# Altium PCB SpaceVNXDaughterBoard.PcbDoc (part 1 of 2)
Units mm, origin at the board's own origin, x right, y up, seen from the top; angles counter-clockwise.
Board outline 55 x 84 mm, 4 copper layers (Top Layer, PWR, GND, Bottom Layer), stack 0.84 mm thick; 87 components, 125 nets, 647 pads, 201 vias.
Unrouted connection lines stored in the file: 124.
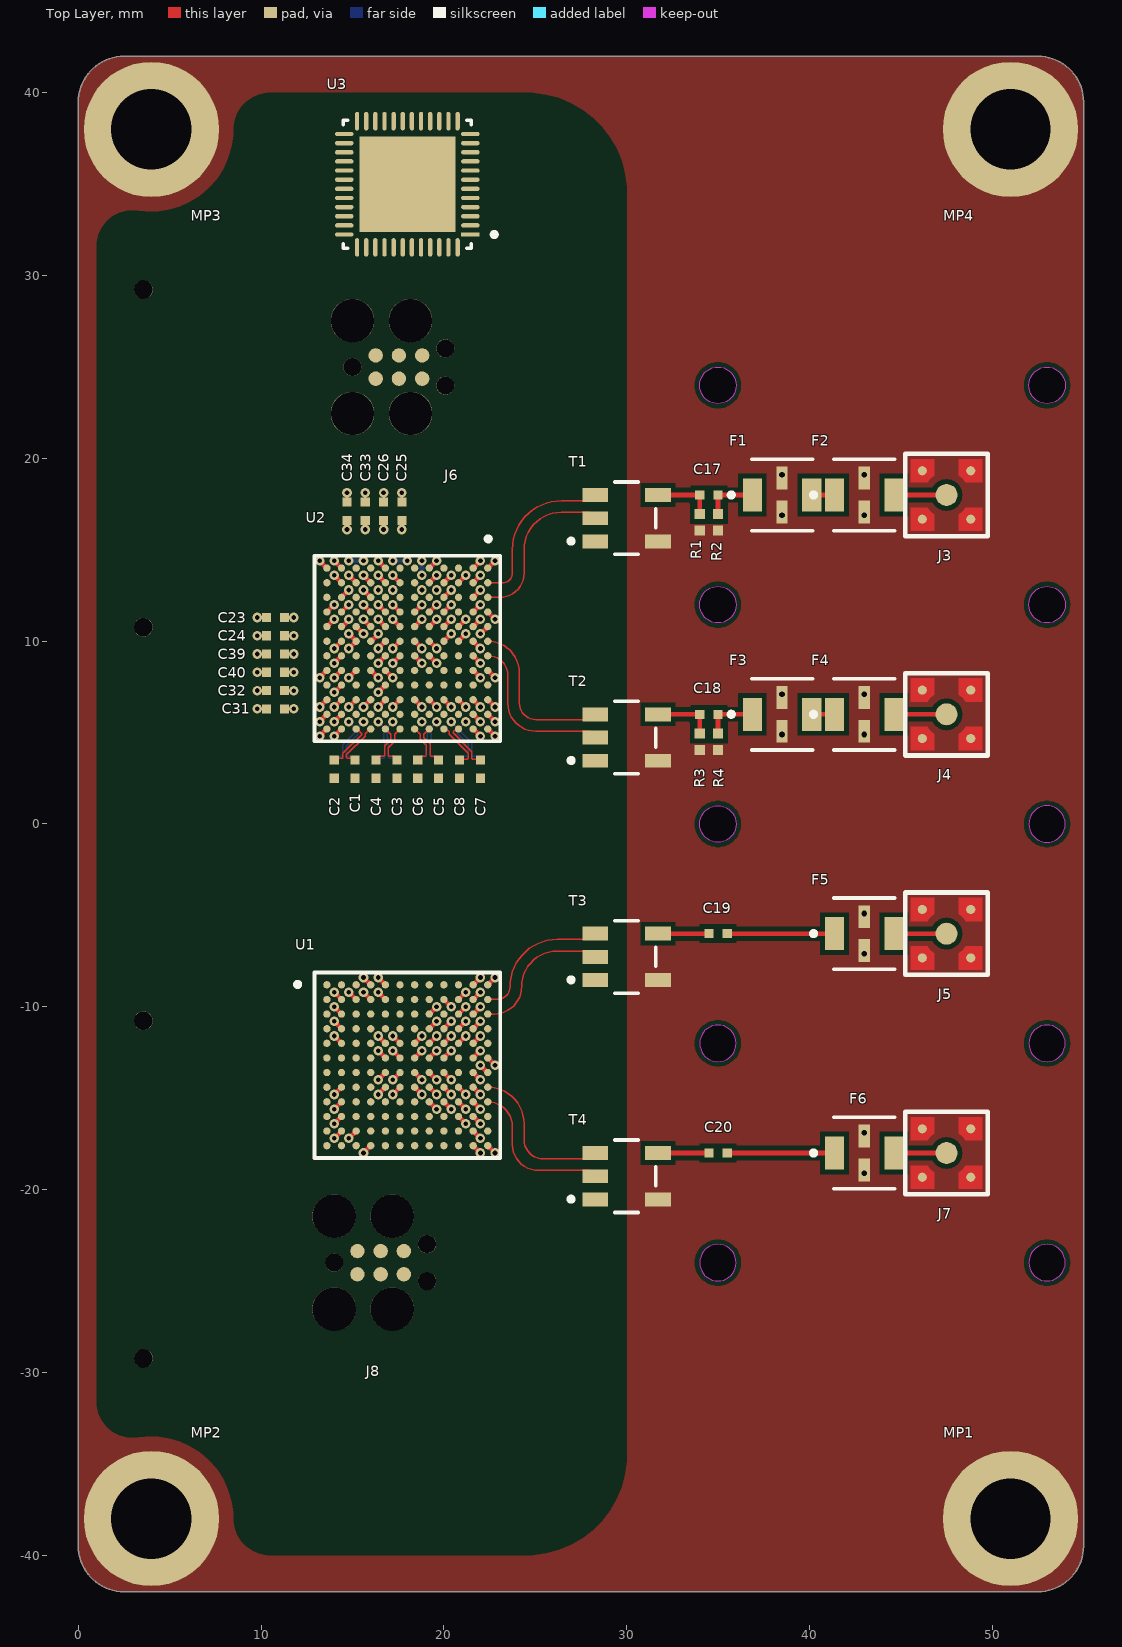
[diagram p0: Top Layer view]
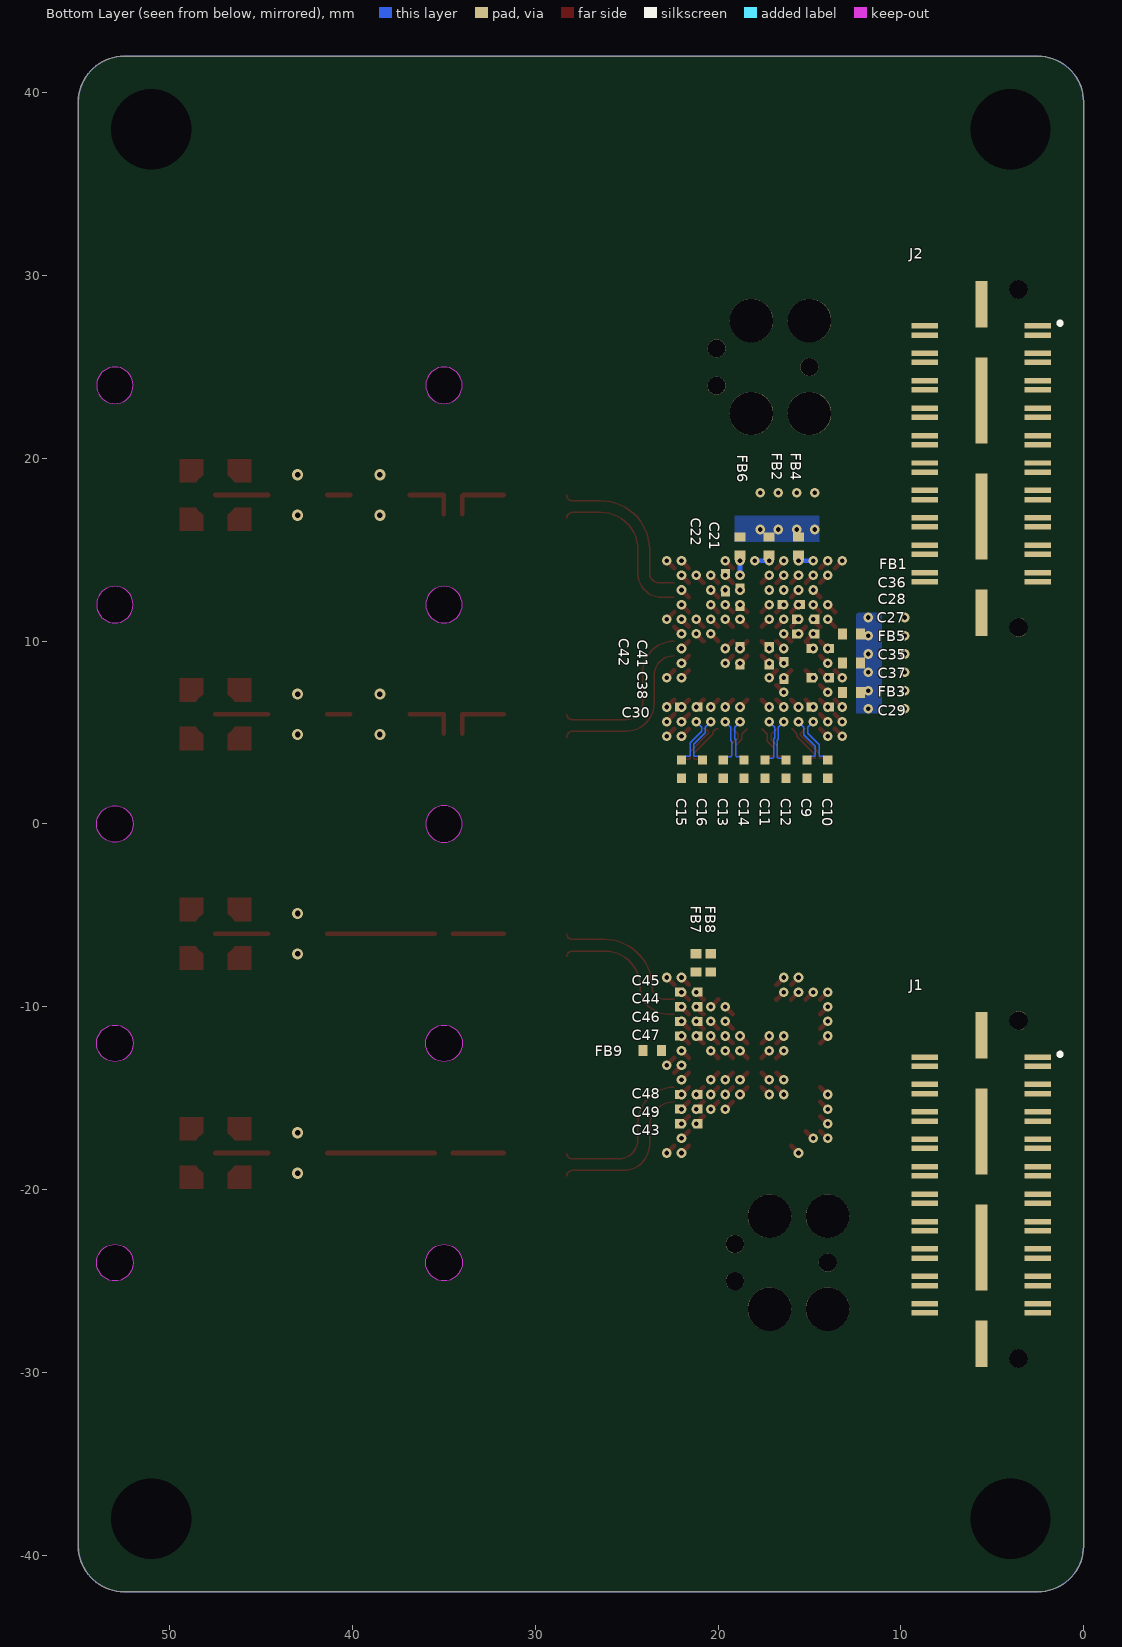
[diagram p1: Bottom Layer view, seen from below]
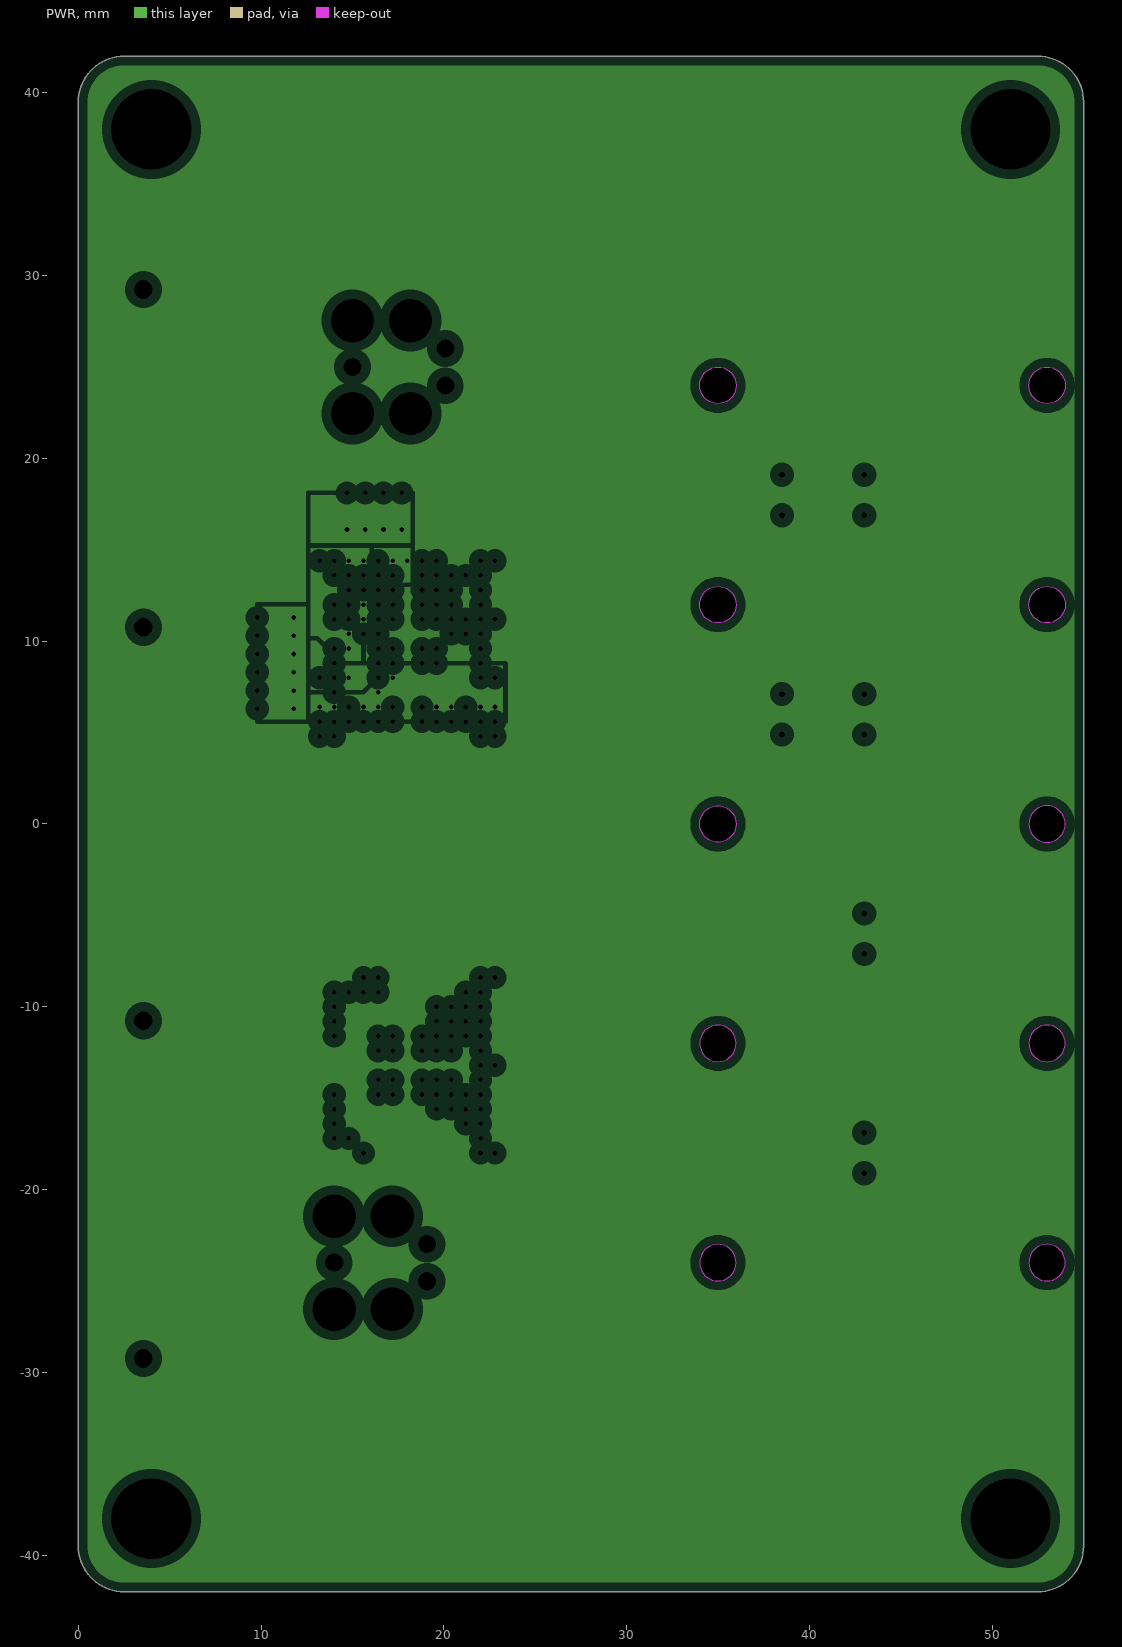
[diagram p2: PWR, clearances drawn from the general rule]
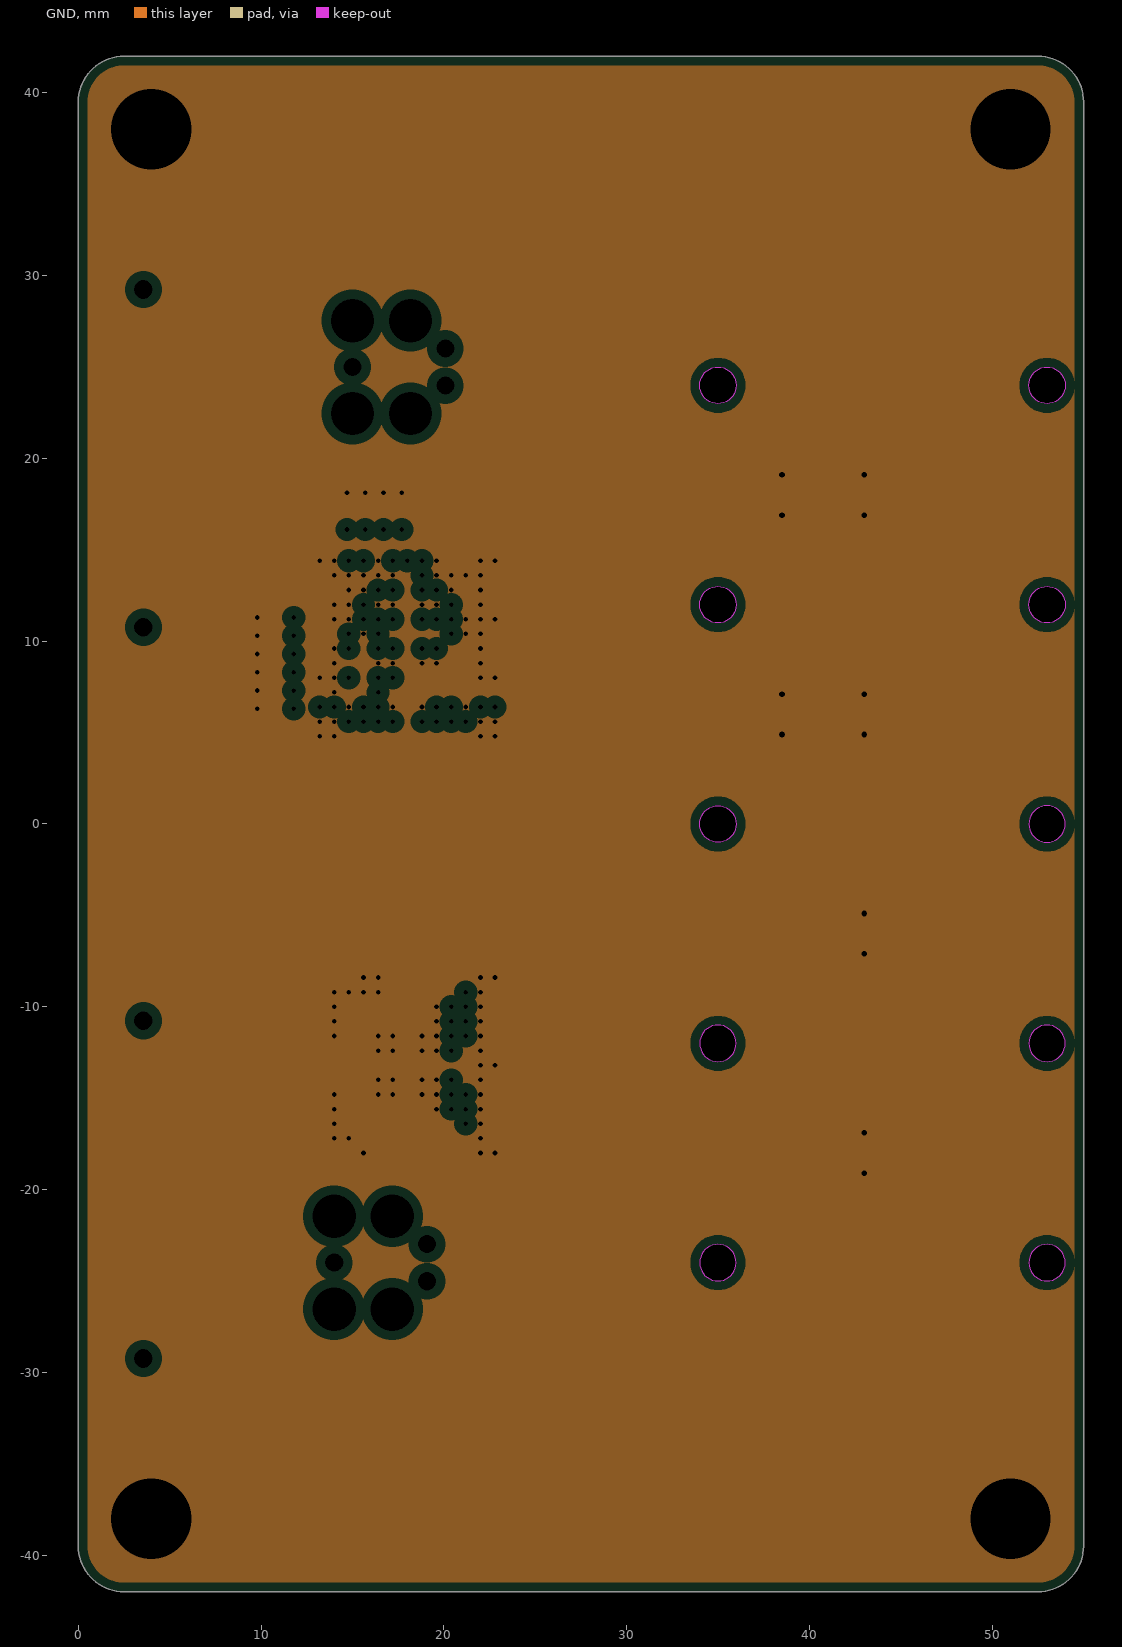
[diagram p3: GND, clearances drawn from the general rule]

## Layer stack, top to bottom
Top Solder: solder mask 0.0127, Solder Resist, Dk 3.8
Top Layer: signal copper 0.07
Dielectric 1: prepreg 0.1, 2313, Dk 4.05
PWR: plane copper 0.0175, net (Multiple Nets)
Core: core 0.465, FR-4, Dk 4.5
GND: plane copper 0.0175, net GND
Dielectric 2: prepreg 0.1, 2313, Dk 4.05
Bottom Layer: signal copper 0.07
Bottom Solder: solder mask 0.0127, Solder Resist, Dk 3.8

## Board outline
0,-39.5 0,39.5 cw(c2.499,39.501) 2.5,42 52.5,42 cw(c52.501,39.501) 55,39.5 55,-39.5 cw(c52.501,-39.501) 52.5,-42 2.5,-42 cw(c2.499,-39.501)
cut-out: 53,23 cw(c53,24) 52,24 cw(c53,24) 53,25 cw(c53,24) 54,24 cw(c53,24)
cut-out: 34.991,23 cw(c34.991,24) 33.991,24 cw(c34.991,24) 34.991,25 cw(c34.991,24) 35.991,24 cw(c34.991,24)
cut-out: 53,11 cw(c53,12) 52,12 cw(c53,12) 53,13 cw(c53,12) 54,12 cw(c53,12)
cut-out: 34.991,11 cw(c34.991,12) 33.991,12 cw(c34.991,12) 34.991,13 cw(c34.991,12) 35.991,12 cw(c34.991,12)
cut-out: 52,0 ccw(c53,0) 53,-1 ccw(c53,0) 54,0 ccw(c53,0) 53,1 ccw(c53,0)
cut-out: 34.991,-1 cw(c34.991,0) 33.991,0 cw(c34.991,0) 34.991,1 cw(c34.991,0) 35.991,0 cw(c34.991,0)
cut-out: 52,-12 ccw(c53,-12) 53,-13 ccw(c53,-12) 54,-12 ccw(c53,-12) 53,-11 ccw(c53,-12)
cut-out: 33.991,-12 ccw(c34.991,-12) 34.991,-13 ccw(c34.991,-12) 35.991,-12 ccw(c34.991,-12) 34.991,-11 ccw(c34.991,-12)
cut-out: 33.991,-24 ccw(c34.991,-24) 34.991,-25 ccw(c34.991,-24) 35.991,-24 ccw(c34.991,-24) 34.991,-23 ccw(c34.991,-24)
cut-out: 52,-24 ccw(c53,-24) 53,-25 ccw(c53,-24) 54,-24 ccw(c53,-24) 53,-23 ccw(c53,-24)

## Design rules (kind name [scope] priority, off if disabled: settings)
Clearance [All] p1: gap=0.254 ignorepadtopadclearanceinfootprint=FALSE except(0: Arc-Hole Track-Hole SMDPad-Hole THPad-Hole Via-Hole Fill-Hole Poly-Hole Region-Hole Text-Hole; 0.1: Arc-Arc Arc-Track Arc-SMDPad Arc-Via Track-Track Track-SMDPad Track-Via SMDPad-SMDPad SMDPad-Via)
DiffPairsRouting DiffPairsRouting_D100 [All] p1: maxlimit=0.127 minlimit=0.127 mostfreqgap=0.127 toplayer_minwidth=0.073 toplayer_maxwidth=0.073 toplayer_prefwidth=0.073 bottomlayer_minwidth=0.073 bottomlayer_maxwidth=0.073 bottomlayer_prefwidth=0.073 impedanceprofiledriven=TRUE impedanceprofileid={867DA405-6C6B-40CE-A2AF-8CDF2B17F313} impedanceprofilevalue=100.000000 maxuncoupledlength=12.7
DiffPairsRouting [All] p2: maxlimit=0.254 minlimit=0.254 mostfreqgap=0.254 toplayer_minwidth=0.381 toplayer_maxwidth=0.381 toplayer_prefwidth=0.381 bottomlayer_minwidth=0.381 bottomlayer_maxwidth=0.381 bottomlayer_prefwidth=0.381 maxuncoupledlength=12.7
PlaneClearance [All] p1: clearance=0.508
PlaneConnect [All] p1: planeconnectstyle=Direct reliefexpansion=0.508 reliefentries=4 reliefconductorwidth=0.254 reliefairgap=0.254
PolygonConnect [All] p1: connectstyle=Direct reliefconductorwidth=0.254 reliefentries=4 polygonreliefangle="90 Angle" airgapwidth=0.254
RoutingVias [All] p1: holewidth=0.25 width=0.5 viastyle="Through Hole" minholewidth=0.25 minwidth=0.5 maxholewidth=0.711 maxwidth=1.27
SolderMaskExpansion [All] p1: expansion=0.102 istentingtop=FALSE
Width [All] p1: maxlimit=0.254 minlimit=0.1 preferedwidth=0.127 minimp=50.000000 maximp=50.000000 favimp=50.000000
Width Width_S50 [All] p2: maxlimit=0.15 minlimit=0.15 preferedwidth=0.15 impedanceprofiledriven=TRUE impedanceprofileid={26B725AB-FFA3-4EF3-BDC9-379EF556A361} impedanceprofilevalue=50.000000 minimp=50.000000 maximp=50.000000 favimp=50.000000
27 further rules are at their usual default settings.

## Classes and differential pairs
differential pair class D100: ADC_INA ADC_INB DAC_IOUTA DAC_IOUTC J1_RX0 J1_RX1 J1_RX2 J1_RX3 J1_TX0 J1_TX1 J1_TX2 J1_TX3 J2_P2C_CLK J2_RX0 J2_RX1 J2_RX2 J2_RX3 J2_TX0 J2_TX1 J2_TX2 J2_TX3 TX0 TX1 TX2 TX3 TX4 TX5 TX6 TX7
differential pair J1_C2P_CLK: +J1_C2P_CLK_P -J1_C2P_CLK_N
differential pair ADC_INB: +ADC_INB_P -ADC_INB_N
differential pair ADC_INA: +ADC_INA_P -ADC_INA_N
differential pair TX7: +TX7_P -TX7_N
differential pair TX6: +TX6_P -TX6_N
differential pair TX5: +TX5_P -TX5_N
differential pair TX4: +TX4_P -TX4_N
differential pair TX3: +TX3_P -TX3_N
differential pair TX2: +TX2_P -TX2_N
differential pair TX1: +TX1_P -TX1_N
differential pair TX0: +TX0_P -TX0_N
differential pair J2_TX3: +J2_TX3_P -J2_TX3_N
differential pair J2_TX2: +J2_TX2_P -J2_TX2_N
differential pair J2_TX1: +J2_TX1_P -J2_TX1_N
differential pair J2_TX0: +J2_TX0_P -J2_TX0_N
differential pair J2_RX3: +J2_RX3_P -J2_RX3_N
differential pair J2_RX2: +J2_RX2_P -J2_RX2_N
differential pair J2_RX1: +J2_RX1_P -J2_RX1_N
differential pair J2_RX0: +J2_RX0_P -J2_RX0_N
differential pair J2_P2C_CLK: +J2_P2C_CLK_P -J2_P2C_CLK_N
differential pair J2_C2P_CLK: +J2_C2P_CLK_P -J2_C2P_CLK_N
differential pair J1_TX3: +J1_TX3_P -J1_TX3_N
differential pair J1_TX2: +J1_TX2_P -J1_TX2_N
differential pair J1_TX1: +J1_TX1_P -J1_TX1_N
differential pair J1_TX0: +J1_TX0_P -J1_TX0_N
differential pair J1_RX3: +J1_RX3_P -J1_RX3_N
differential pair J1_RX2: +J1_RX2_P -J1_RX2_N
differential pair J1_RX1: +J1_RX1_P -J1_RX1_N
differential pair J1_RX0: +J1_RX0_P -J1_RX0_N
differential pair DAC_IOUTC: +DAC_IOUTC_P -DAC_IOUTC_N
differential pair DAC_IOUTA: +DAC_IOUTA_P -DAC_IOUTA_N

## Components (designator, comment, footprint, x,y, rotation, side; value= is the part's Value field where it differs from the comment)
C1 "220nF, 10V" WURTH_WCAP-CSGP_0402 15.143,3 r90 top locked
C2 "220nF, 10V" WURTH_WCAP-CSGP_0402 14,3 r90 top locked
C3 "220nF, 10V" WURTH_WCAP-CSGP_0402 17.429,3 r90 top locked
C4 "220nF, 10V" WURTH_WCAP-CSGP_0402 16.286,3 r90 top locked
C5 "220nF, 10V" WURTH_WCAP-CSGP_0402 19.714,3 r90 top locked
C6 "220nF, 10V" WURTH_WCAP-CSGP_0402 18.571,3 r90 top locked
C7 "220nF, 10V" WURTH_WCAP-CSGP_0402 22,3 r90 top locked
C8 "220nF, 10V" WURTH_WCAP-CSGP_0402 20.857,3 r90 top locked
C9 "220nF, 10V" WURTH_WCAP-CSGP_0402 15.143,3 r90 bottom locked
C10 "220nF, 10V" WURTH_WCAP-CSGP_0402 14,3 r90 bottom locked
C11 "220nF, 10V" WURTH_WCAP-CSGP_0402 17.429,3 r90 bottom locked
C12 "220nF, 10V" WURTH_WCAP-CSGP_0402 16.286,3 r90 bottom locked
C13 "220nF, 10V" WURTH_WCAP-CSGP_0402 19.714,3 r90 bottom locked
C14 "220nF, 10V" WURTH_WCAP-CSGP_0402 18.571,3 r90 bottom locked
C15 "220nF, 10V" WURTH_WCAP-CSGP_0402 22,3 r90 bottom locked
C16 "220nF, 10V" WURTH_WCAP-CSGP_0402 20.857,3 r90 bottom locked
C17 "10pF, 16V" WURTH_WCAP-CSGP_0402 34.5,18 r0 top locked
C18 "10pF, 16V" WURTH_WCAP-CSGP_0402 34.5,6 r0 top locked
C19 "10pF, 16V" WURTH_WCAP-CSGP_0402 35,-6 r0 top locked
C20 "10pF, 16V" WURTH_WCAP-CSGP_0402 35,-18 r0 top locked
C21 "10µF, 6.3V" WURTH_WCAP-CSGP_0402 18.8,12.4 r90 bottom locked
C22 "100nF, 10V" WURTH_WCAP-CSGP_0402 19.6,13.2 r270 bottom locked
C23 "10µF, 6.3V" WURTH_WCAP-CSGP_0402 10.787,11.3 r0 top locked
C24 "100nF, 10V" WURTH_WCAP-CSGP_0402 10.787,10.3 r0 top locked
C25 "100nF, 10V" WURTH_WCAP-CSGP_0402 17.7,17.113 r270 top locked
C26 "10µF, 6.3V" WURTH_WCAP-CSGP_0402 16.7,17.113 r270 top locked
C27 "100nF, 10V" WURTH_WCAP-CSGP_0402 15.2,11.2 r0 bottom locked
C28 "10µF, 6.3V" WURTH_WCAP-CSGP_0402 16,12 r180 bottom locked
C29 "10µF, 6.3V" WURTH_WCAP-CSGP_0402 14.4,6.4 r180 bottom locked
C30 "100nF, 10V" WURTH_WCAP-CSGP_0402 21.6,6.4 r0 bottom locked
C31 "10µF, 6.3V" WURTH_WCAP-CSGP_0402 10.787,6.3 r0 top locked
C32 "100nF, 10V" WURTH_WCAP-CSGP_0402 10.787,7.3 r0 top locked
C33 "100nF, 10V" WURTH_WCAP-CSGP_0402 15.7,17.113 r270 top locked
C34 "10µF, 6.3V" WURTH_WCAP-CSGP_0402 14.7,17.113 r270 top locked
C35 "100nF, 10V" WURTH_WCAP-CSGP_0402 14.4,9.6 r0 bottom locked
C36 "10µF, 6.3V" WURTH_WCAP-CSGP_0402 15.2,10.4 r180 bottom locked
C37 "10µF, 6.3V" WURTH_WCAP-CSGP_0402 14.4,8 r0 bottom locked
C38 "100nF, 10V" WURTH_WCAP-CSGP_0402 16.4,8.4 r270 bottom locked
C39 "10µF, 6.3V" WURTH_WCAP-CSGP_0402 10.787,9.3 r0 top locked
C40 "100nF, 10V" WURTH_WCAP-CSGP_0402 10.787,8.3 r0 top locked
C41 "10µF, 6.3V" WURTH_WCAP-CSGP_0402 17.2,9.2 r90 bottom locked
C42 "10µF, 6.3V" WURTH_WCAP-CSGP_0402 18.8,9.2 r90 bottom locked
C43 "10µF, 6.3V" WURTH_WCAP-CSGP_0402 21.6,-16.4 r180 bottom
C44 "100nF, 10V" WURTH_WCAP-CSGP_0402 21.6,-10 r180 bottom
C45 "100nF, 10V" WURTH_WCAP-CSGP_0402 21.6,-9.2 r180 bottom
C46 "10µF, 6.3V" WURTH_WCAP-CSGP_0402 21.6,-10.8 r180 bottom
C47 "100nF, 10V" WURTH_WCAP-CSGP_0402 21.6,-11.6 r180 bottom
C48 "100nF, 10V" WURTH_WCAP-CSGP_0402 21.6,-14.8 r180 bottom
C49 "100nF, 10V" WURTH_WCAP-CSGP_0402 21.6,-15.6 r180 bottom
F1 "BFTC-XXXX+" Mini-Circuits_FV1206 38.5,18 r0 top locked
F2 "BFTC-XXXX+" Mini-Circuits_FV1206 43,18 r0 top locked
F3 "BFTC-XXXX+" Mini-Circuits_FV1206 38.5,6 r0 top locked
F4 "BFTC-XXXX+" Mini-Circuits_FV1206 43,6 r0 top locked
F5 "BFTC-XXXX+" Mini-Circuits_FV1206 43,-6 r0 top locked
F6 "BFTC-XXXX+" Mini-Circuits_FV1206 43,-18 r0 top locked
FB1 "120Ohm, 1.1A" WURTH-CBF_0402 12.7,10.4 r0 bottom locked
FB2 "120Ohm, 1.1A" WURTH-CBF_0402 17.2,15.2 r270 bottom locked
FB3 "120Ohm, 1.1A" WURTH-CBF_0402 12.7,7.2 r0 bottom locked
FB4 "120Ohm, 1.1A" WURTH-CBF_0402 15.6,15.2 r270 bottom locked
FB5 "120Ohm, 1.1A" WURTH-CBF_0402 12.7,8.8 r0 bottom locked
FB6 "120Ohm, 1.1A" WURTH-CBF_0402 18.8,15.2 r270 bottom locked
FB7 "120Ohm, 1.1A" WURTH-CBF_0402 21.2,-7.6 r270 bottom
FB8 "120Ohm, 1.1A" WURTH-CBF_0402 20.4,-7.6 r270 bottom
FB9 "120Ohm, 1.1A" WURTH-CBF_0402 23.6,-12.4 r180 bottom
J1 "QTH-020-01-F-D-DP" SAMTEC_QTH-020-01-X-D-DP-A 5.59,-20 r270 bottom locked
J2 "QTH-020-01-F-D-DP" SAMTEC_QTH-020-01-X-D-DP-A 5.59,20 r270 bottom locked
J3 "MMCX-J-P-X-ST-SM1" MMCX-J-P-X-ST-SM1 47.5,18 r0 top locked
J4 "MMCX-J-P-X-ST-SM1" MMCX-J-P-X-ST-SM1 47.5,6 r0 top locked
J5 "MMCX-J-P-X-ST-SM1" MMCX-J-P-X-ST-SM1 47.5,-6 r0 top locked
J6 "TC2030" TC2030-DUAL 15,25 r0 top
J7 "MMCX-J-P-X-ST-SM1" MMCX-J-P-X-ST-SM1 47.5,-18 r0 top locked
J8 "TC2030" TC2030-DUAL 14,-24 r0 top locked
MP1 "M3x4mm" 90910A572#1 50.997,-38.002 r0 top
MP2 "M3x4mm" 90910A572#2 4.004,-37.999 r0 top
MP3 "M2x4mm" 90910A572#3 4.312,37.75 r0 top
MP4 "M2x4mm" 90910A572#4 51.009,38 r0 top
R1 "100 Ω" PANASONIC_ERJ2G_0402 34,16.5 r90 top locked
R2 "100 Ω" PANASONIC_ERJ2G_0402 35,16.5 r90 top locked
R3 "100 Ω" PANASONIC_ERJ2G_0402 34,4.5 r90 top locked
R4 "100 Ω" PANASONIC_ERJ2G_0402 35,4.5 r90 top locked
T1 "ETC1-1T-2TR" MA-COM_ETC1-1T-2TR 30,16.73 r90 top locked
T2 "ETC1-1T-2TR" MA-COM_ETC1-1T-2TR 30,4.73 r90 top locked
T3 "ETC1-1T-2TR" MA-COM_ETC1-1T-2TR 30,-7.27 r90 top locked
T4 "ETC1-1T-2TR" MA-COM_ETC1-1T-2TR 30,-19.27 r90 top locked
U1 "DAC37J82" TEXAS_FCBGA144 18,-13.2 r0 top locked
U2 "ADC12DJ800" TEXAS_FCBGA144 18,9.6 r270 top locked
U3 "MSP430FR5969IRGZR" TEXAS_VQFN48 18,35 r180 top

## Footprints (in the part's own frame and the unit in brackets; to place one, negate y for a bottom-side part, rotate by r counter-clockwise, add the part's x,y. Pads: shape width x height; smd on the part's side, far side on the other; paste and mask are expansions set on the pad)
90910A572#1 [mm] "Button Head Torx Screws 18-8 Stainless Steel, M3 x 0.5 mm Thread, 4 mm Long"
  round 7.4 / inner round 0 / far side round 0 hole 4.4 unplated paste-403.566: 1(0.003,0.002)
  body extent -2.85,-2.85 2.85,2.85, height 1.7
90910A572#2 [mm] "Button Head Torx Screws 18-8 Stainless Steel, M3 x 0.5 mm Thread, 4 mm Long"
  round 7.4 / inner round 0 / far side round 0 hole 4.4 unplated paste-403.566: 1(-0.004,-0.001)
  body extent -2.85,-2.85 2.85,2.85, height 1.7
90910A572#3 [mm] "Button Head Torx Screws 18-8 Stainless Steel, M3 x 0.5 mm Thread, 4 mm Long"
  round 7.4 / inner round 0 / far side round 0 hole 4.4 unplated paste-403.566: 1(-0.312,0.25)
  body extent -2.85,-2.85 2.85,2.85, height 1.7
90910A572#4 [mm] "Button Head Torx Screws 18-8 Stainless Steel, M3 x 0.5 mm Thread, 4 mm Long"
  round 7.4 / inner round 0 / far side round 0 hole 4.4 unplated paste-403.566: 1(-0.009,0)
  body extent -2.85,-2.85 2.85,2.85, height 1.7
MA-COM_ETC1-1T-2TR [mm]
  rect 0.76x1.4 smd paste+0 mask+0: 1(-1.27,1.715) 2(0,1.715) 3(1.27,1.715) 4(1.27,-1.715) 5(-1.27,-1.715)
  silkscreen extent -1.98,-1.59 1.98,3.16, body extent -2.08,-2.51 2.08,2.51, height 0.25
Mini-Circuits_FV1206 [mil] "3.2 X 1.6 mm Ceramic Body, 0.94 mm Height"
  rect 41x71 smd paste+0 mask+0: 1(-64,0) 3(64,0)
  rect 24x49 smd paste+0 mask+0: 2(0,-36.5) 2(0,36.5)
  silkscreen extent -114,-77 66,77, body extent -88,-65 88,65, height 10
MMCX-J-P-X-ST-SM1 [mm]
  round 0.5 smd: G1(-1.325,1.325) G2(1.325,1.325) G3(-1.325,-1.325) G4(1.325,-1.325)
  round 1.2 smd mask+0.05: S1(0,0)
  Top Layer region: 1.059,-0.688 1.962,-0.688 1.962,-1.962 0.663,-1.962 0.667,-1.08 0.901,-0.901 1.062,-0.69 1.059,-0.688
  Top Layer region: -1.059,-0.688 -1.962,-0.688 -1.962,-1.962 -0.663,-1.962 -0.667,-1.08 -0.901,-0.901 -1.062,-0.69 -1.059,-0.688
  Top Layer region: 1.059,0.688 1.962,0.688 1.962,1.962 0.663,1.962 0.667,1.08 0.901,0.901 1.062,0.69 1.059,0.688
  Top Layer region: -1.059,0.688 -1.962,0.688 -1.962,1.962 -0.663,1.962 -0.667,1.08 -0.901,0.901 -1.062,0.69 -1.059,0.688
  silkscreen extent -2.25,-2.25 2.25,2.25, body extent -1.72,-1.75 1.73,1.75, height 5
PANASONIC_ERJ2G_0402 [mm] "Chip Resistor, 2-Leads, Body 1,00x0,50mm, IPC Medium Density"
  rect 0.55x0.55 smd: 1(-0.45,0) 2(0.45,0)
  body extent -0.5,-0.25 0.5,0.25, height 0.36
SAMTEC_QTH-020-01-X-D-DP-A [mm]
  rect 0.3x1.45 smd: 01(-7.25,3.09) 02(-7.25,-3.09) 03(-6.75,3.09) 04(-6.75,-3.09) 05(-5.75,3.09) 06(-5.75,-3.09) 07(-5.25,3.09) 08(-5.25,-3.09) 09(-4.25,3.09) 10(-4.25,-3.09) 11(-3.75,3.09) 12(-3.75,-3.09) 13(-2.75,3.09) 14(-2.75,-3.09) 15(-2.25,3.09) 16(-2.25,-3.09) 17(-1.25,3.09) 18(-1.25,-3.09) 19(-0.75,3.09) 20(-0.75,-3.09) 21(0.25,3.09) 22(0.25,-3.09) 23(0.75,3.09) 24(0.75,-3.09) 25(1.75,3.09) 26(1.75,-3.09) 27(2.25,3.09) 28(2.25,-3.09) 29(3.25,3.09) 30(3.25,-3.09) 31(3.75,3.09) 32(3.75,-3.09) 33(4.75,3.09) 34(4.75,-3.09) 35(5.25,3.09) 36(5.25,-3.09) 37(6.25,3.09) 38(6.25,-3.09) 39(6.75,3.09) 40(6.75,-3.09)
  rect 2.54x0.64 smd: G1(-8.445,0) G4(8.445,0)
  rect 4.7x0.64 smd: G2(-3.175,0) G3(3.175,0)
  round 1.02 hole 1.02 unplated: ""(-9.24,2.03) ""(9.24,2.03)
  silkscreen extent -7.5,4.2 -7.3,4.4, body extent -10.01,-3.56 10.01,3.56, height 4.06
TC2030-DUAL [mil]
  round 31 smd paste-393.7: 1(50,-25) 2(50,25) 3(100,-25) 4(100,25) 5(150,-25) 6(150,25)
  round 39 hole 39 unplated: A(0,0) B(200,40) C(200,-40)
  round 93.5 hole 93.5 unplated: D(0,-100) E(125,-100) F(0,100) G(125,100)
TEXAS_FCBGA144 [mm] "AAV"
  round 0.4 smd paste+0 mask+0: A1(-4.4,4.4) A2(-3.6,4.4) A3(-2.8,4.4) A4(-2,4.4) A5(-1.2,4.4) A6(-0.4,4.4) A7(0.4,4.4) A8(1.2,4.4) A9(2,4.4) A10(2.8,4.4) A11(3.6,4.4) A12(4.4,4.4) B1(-4.4,3.6) B2(-3.6,3.6) B3(-2.8,3.6) B4(-2,3.6) B5(-1.2,3.6) B6(-0.4,3.6) B7(0.4,3.6) B8(1.2,3.6) B9(2,3.6) B10(2.8,3.6) B11(3.6,3.6) B12(4.4,3.6) C1(-4.4,2.8) C2(-3.6,2.8) C3(-2.8,2.8) C4(-2,2.8) C5(-1.2,2.8) C6(-0.4,2.8) C7(0.4,2.8) C8(1.2,2.8) C9(2,2.8) C10(2.8,2.8) C11(3.6,2.8) C12(4.4,2.8) D1(-4.4,2) D2(-3.6,2) D3(-2.8,2) D4(-2,2) D5(-1.2,2) D6(-0.4,2) D7(0.4,2) D8(1.2,2) D9(2,2) D10(2.8,2) D11(3.6,2) D12(4.4,2) E1(-4.4,1.2) E2(-3.6,1.2) E3(-2.8,1.2) E4(-2,1.2) E5(-1.2,1.2) E6(-0.4,1.2) E7(0.4,1.2) E8(1.2,1.2) E9(2,1.2) E10(2.8,1.2) E11(3.6,1.2) E12(4.4,1.2) F1(-4.4,0.4) F2(-3.6,0.4) F3(-2.8,0.4) F4(-2,0.4) F5(-1.2,0.4) F6(-0.4,0.4) F7(0.4,0.4) F8(1.2,0.4) F9(2,0.4) F10(2.8,0.4) F11(3.6,0.4) F12(4.4,0.4) G1(-4.4,-0.4) G2(-3.6,-0.4) G3(-2.8,-0.4) G4(-2,-0.4) G5(-1.2,-0.4) G6(-0.4,-0.4) G7(0.4,-0.4) G8(1.2,-0.4) G9(2,-0.4) G10(2.8,-0.4) G11(3.6,-0.4) G12(4.4,-0.4) H1(-4.4,-1.2) H2(-3.6,-1.2) H3(-2.8,-1.2) H4(-2,-1.2) H5(-1.2,-1.2) H6(-0.4,-1.2) H7(0.4,-1.2) H8(1.2,-1.2) H9(2,-1.2) H10(2.8,-1.2) H11(3.6,-1.2) H12(4.4,-1.2) J1(-4.4,-2) J2(-3.6,-2) J3(-2.8,-2) J4(-2,-2) J5(-1.2,-2) J6(-0.4,-2) J7(0.4,-2) J8(1.2,-2) J9(2,-2) J10(2.8,-2) J11(3.6,-2) J12(4.4,-2) K1(-4.4,-2.8) K2(-3.6,-2.8) K3(-2.8,-2.8) K4(-2,-2.8) K5(-1.2,-2.8) K6(-0.4,-2.8) K7(0.4,-2.8) K8(1.2,-2.8) K9(2,-2.8) K10(2.8,-2.8) K11(3.6,-2.8) K12(4.4,-2.8) L1(-4.4,-3.6) L2(-3.6,-3.6) L3(-2.8,-3.6) L4(-2,-3.6) L5(-1.2,-3.6) L6(-0.4,-3.6) L7(0.4,-3.6) L8(1.2,-3.6) L9(2,-3.6) L10(2.8,-3.6) L11(3.6,-3.6) L12(4.4,-3.6) M1(-4.4,-4.4) M2(-3.6,-4.4) M3(-2.8,-4.4) M4(-2,-4.4) M5(-1.2,-4.4) M6(-0.4,-4.4) M7(0.4,-4.4) M8(1.2,-4.4) M9(2,-4.4) M10(2.8,-4.4) M11(3.6,-4.4) M12(4.4,-4.4)
  silkscreen extent -6.12,-5.07 5.07,5.07, body extent -5,-5 5,5, height 1.77
TEXAS_VQFN48 [mm] "RGZ, 0.5mm pitch, 7x7mm body"
  rect 1.01x0.239 smd paste+0 mask+0: 1(-3.451,2.75)
  rrect100% 1.01x0.239 smd paste+0 mask+0: 2(-3.451,2.25) 3(-3.451,1.75) 4(-3.451,1.25) 5(-3.451,0.75) 6(-3.451,0.25) 7(-3.451,-0.25) 8(-3.451,-0.75) 9(-3.451,-1.25) 10(-3.451,-1.75) 11(-3.451,-2.25) 12(-3.451,-2.75) 25(3.451,-2.75) 26(3.451,-2.25) 27(3.451,-1.75) 28(3.451,-1.25) 29(3.451,-0.75) 30(3.451,-0.25) 31(3.451,0.25) 32(3.451,0.75) 33(3.451,1.25) 34(3.451,1.75) 35(3.451,2.25) 36(3.451,2.75)
  rrect100% 0.239x1.01 smd paste+0 mask+0: 13(-2.75,-3.451) 14(-2.25,-3.451) 15(-1.75,-3.451) 16(-1.25,-3.451) 17(-0.75,-3.451) 18(-0.25,-3.451) 19(0.25,-3.451) 20(0.75,-3.451) 21(1.25,-3.451) 22(1.75,-3.451) 23(2.25,-3.451) 24(2.75,-3.451) 37(2.75,3.451) 38(2.25,3.451) 39(1.75,3.451) 40(1.25,3.451) 41(0.75,3.451) 42(0.25,3.451) 43(-0.25,3.451) 44(-0.75,3.451) 45(-1.25,3.451) 46(-1.75,3.451) 47(-2.25,3.451) 48(-2.75,3.451)
  rect 5.25x5.25 smd paste-1000 mask+0: 49(0,0)
  silkscreen extent -4.88,-3.5 3.5,3.5, body extent -4.46,-4.46 4.46,4.46, height 0.25
WURTH-CBF_0402 [mm] "SMD EMI Suppression Ferrite  Bead, body 1x0.5mm"
  rect 0.5x0.6 smd: 1(-0.5,0) 2(0.5,0)
  body extent -0.5,-0.25 0.5,0.25, height 0.5
WURTH_WCAP-CSGP_0402 [mm] "Ceramic Capacitors, body 1x0.5mm"
  rect 0.5x0.5 smd: 1(-0.5,0) 2(0.5,0)
  body extent -0.5,-0.25 0.5,0.25, height 0.5

## Part data
C1 C2 C3 C4 C5 C6 C7 C8 C9 C10 C11 C12 C13 C14 C15 C16: library part 885012105011, "WCAP-CSGP Multilayer Ceramic Chip Capacitor, General Purpose, size 0402, X5R, 220nF, 10V", Capacitance=220nF, Capacitance Tolerance=+/-20%, Isolation Resistance  min.=2.3GOhm, Manufacturer="Wurth Elektronik", Operating Temperature="-55 to +85degC", Rated Voltage=10VDC, Ceramic Type=X5R, ComponentLink1Description=Manufacturer, ComponentLink1URL=http://www.we-online.de, ComponentLink2Description=Datasheet, ComponentLink2URL=https://www.we-online.com/catalog/datasheet/885012105011.pdf, Dissipation Factor max.=5%, Height=0.5mm, Manufacturer Part Number=885012105011, Mounting Technology=SMT, Packaging="Tape and Reel", Published Date="April 2021", Q-Factor min.=-, Size=0402, Technical Reference=X5R0402224M010DFCT10000
C17 C18 C19 C20: library part 885012005025, "WCAP-CSGP Multilayer Ceramic Chip Capacitor, General Purpose, size 0402, NP0, 10pF, 16V", Capacitance=10pF, Capacitance Tolerance=+/-5%, Isolation Resistance  min.=10GOhm, Manufacturer="Wurth Elektronik", Operating Temperature="-55 to +125degC", Rated Voltage=16VDC, Ceramic Type=NP0, ComponentLink1Description=Manufacturer, ComponentLink1URL=http://www.we-online.de, ComponentLink2Description=Datasheet, ComponentLink2URL=https://www.we-online.com/catalog/datasheet/885012005025.pdf, Dissipation Factor max.=-, Height=0.5mm, Manufacturer Part Number=885012005025, Mounting Technology=SMT, Packaging="Tape and Reel", Published Date="April 2021", Q-Factor min.=400+20C, Size=0402, Technical Reference=NP00402100J016DFCT10000
C21 C23 C26 C28 C29 C31 C34 C36 C37 C39 C41 C42 C43 C46: library part 885012105020, "WCAP-CSGP Multilayer Ceramic Chip Capacitor, General Purpose, size 0402, X5R, 10uF, 6.3V", Capacitance=10uF, Capacitance Tolerance=+/20%, Isolation Resistance  min.=0.01GOhm, Manufacturer="Wurth Elektronik", Operating Temperature="-55 to +85degC", Rated Voltage=6.3VDC, Ceramic Type=X5R, ComponentLink1Description=Manufacturer, ComponentLink1URL=http://www.we-online.de, ComponentLink2Description=Datasheet, ComponentLink2URL=https://www.we-online.com/catalog/datasheet/885012105020.pdf, Dissipation Factor max.=10%, Height=0.5mm, Manufacturer Part Number=885012105020, Mounting Technology=SMT, Packaging="Tape and Reel", Published Date="April 2021", Q-Factor min.=-, Size=0402, Technical Reference=X5R0402106M6R3DFCT10000
C22 C24 C25 C27 C30 C32 C33 C35 C38 C40 C44 C45 C47 C48 C49: library part 885012205018, "WCAP-CSGP Multilayer Ceramic Chip Capacitor, General Purpose, size 0402, X7R, 100nF, 10V", Capacitance=100nF, Capacitance Tolerance=+/-10%, Isolation Resistance  min.=5GOhm, Manufacturer="Wurth Elektronik", Operating Temperature="-55 to +125degC", Rated Voltage=10VDC, Ceramic Type=X7R, ComponentLink1Description=Manufacturer, ComponentLink1URL=http://www.we-online.de, ComponentLink2Description=Datasheet, ComponentLink2URL=https://www.we-online.com/catalog/datasheet/885012205018.pdf, Dissipation Factor max.=5%, Height=0.5mm, Manufacturer Part Number=885012205018, Mounting Technology=SMT, Packaging="Tape and Reel", Published Date="April 2021", Q-Factor min.=-, Size=0402, Technical Reference=X7R0402104K010DFCT10000
F1 F2 F3 F4 F5 F6: "Band Pass RF Filter", Case Style=FV1206, Manufacturer=Mini-Circuits, Supplier Part Number 1=139-BFCN-1860, Body Size="3.2mm x 1.6mm", ComponentLink1Description=Manufacturer, ComponentLink1URL=https://www.minicircuits.com/WebStore/RF-Filters.html, ComponentLink2Description="Case Style", ComponentLink2URL=https://www.minicircuits.com/case_style/FV1206.pdf, ComponentLink3Description="Sugested Mounting Configuration", ComponentLink3URL=https://www.minicircuits.com/pcb/98-pl137.pdf, Impedance=50Ω, Rejection (dB)=20, Supplier 1=Mouser, Supplier 2=Digi-Key, Supplier Part Number 2=3157-BFCN-1860+CT-ND, Technology=LTCC
FB1 FB2 FB3 FB4 FB5 FB6 FB7 FB8 FB9: library part 74279271, "WE-CBF SMT EMI Suppression Ferrite Bead, size 0402, 120Ohm, 1.1A", DC Resistance max.=0.2Ohm, Manufacturer="Wurth Elektronik", Operating Temperature="-55 to +125degC", Rated Current=1.1A, ComponentLink1Description=Manufacturer, ComponentLink1URL=http://www.we-online.de, ComponentLink2Description=Datasheet, ComponentLink2URL=https://www.we-online.com/catalog/datasheet/74279271.pdf, Height=0.5mm, Impedance @100MHz=120Ohm, Impedance max.=200Ohm, Length=1mm, Manufacturer Part Number=74279271, Mounting Technology=SMT, Packaging="Tape and Reel", Published Date="December 2021", Size=0402, Type="Wide Band", Width=0.5mm
J1 J2: "0.50 mm Q Pairs® High-Speed Ground Plane Terminal Strip, Differential Pair", Supplier Part Number 1=QTH-020-01-F-D-DP-ND, ComponentLink1Description=MF, ComponentLink1URL=https://www.samtec.com/products/qth-dp, MF=Samtec, MP=QTH-020-01-F-D-DP, Supplier 1=Digi-Key, Supplier 2=Mouser, Supplier Part Number 2=200-QTH02001FDDP, System=Connector
J3 J4 J5 J7: "50 Ω MMCX up to 6 GHz", Manufacturer=Samtec, Max. Frequency="6 GHz", Gender=Jack, Impedance=50Ω, Orientation=Straight, Termination="Surface Mount"
J6 J8: "Tag-Connect 6-pin Plug-of-Nails spring-pin cable footprint", Manufacturer=Tag-Connect, Manufacturer_PN=TC2030-IDC
MP1 MP2: library part 90910A572, "Button Head Torx Screws 18-8 Stainless Steel, M3 x 0.5 mm Thread, 4 mm Long", ComponentLink1Description=Manufacturer, ComponentLink1URL=https://www.mcmaster.com/90910A572/
MP3 MP4: library part 90910A920, "Button Head Torx Screws 18-8 Stainless Steel, M2 x 0.4mm Thread, 4mm Long", ComponentLink1Description=Manufacturer, ComponentLink1URL=https://www.mcmaster.com/90910A920/
R1 R2 R3 R4: library part ERJ2GEJ101X, "General Purpose Thick Film Chip Resistors", Limiting Voltage (0402)=50, Manufacturer=Panasonic, Maximum Voltage (0402)=100, Power (0402)="0.1 W", Resistance Range (Ω)="1Ω to 100MΩ", Supplier Part Number 1=P100JTR-ND, Temperature Range (ºC)="-55 to +155", AEC 200="Grade 0", ComponentLink1Description=Catalog, ComponentLink1URL=https://industrial.panasonic.com/ww/products/pt/general-purpose-chip-resistors/models?op=search&model_status_current=1&page=0#model-list-search-results, Series=ERJ, Size (0402)=2GE, Supplier 1=Digi-Key, Supplier 2=Mouser, Supplier Part Number 2=667-ERJ-2GEJ101X
T1 T2 T3 T4: "1:1 Flux Coupled Balun 0.1-200MHz", Frequency Range="100 kHz to 200 MHz", Maximum DC Current="30 mA", Package=SM-22-5, Power Rating="250 mW (1/4 W)", Supplier Part Number 1=937-ETC1-1T-2, ComponentLink1Description=Manufacturer, ComponentLink1URL=https://www.macom.com/products/product-detail/ETC1-1T-2TR, Primary Impedance="50 Ohms", Supplier 1=Mouser, Supplier 2=Digi-Key, Supplier Part Number 2=ETC1-1T-2TR-ND, Type="RF transformer"
U1: "Dual-Channel, 16-Bit, 1.6/2.5 GSPS, Digital-to-Analog Converter with 12.5 Gbps JESD204B Interface.", Operating temperature range (C)="-40ºC to 85ºC", Power consumption (Typ) (mW)=789, Rating=Catalog, Supplier Part Number 1=595-DAC37J82IAAV, Architecture="Current Source", ComponentLink1Description=Manufacturer, ComponentLink1URL=https://www.ti.com/product/DAC37J82?utm_source=google&utm_medium=cpc&utm_campaign=asc-null-null-GPN_EN-cpc-pf-google-wwe&utm_content=DAC37J82&ds_k=DAC37J82&DCM=yes&gclid=Cj0KCQjwgYSTBhDKARIsAB8Kukuy5g6TyeX5f3mFZCn5sLi-sPSUjPmCm8keN_PwoqNiLrqoEt2qAw0aArvDEALw_wcB&gclsrc=aw.ds#pps, Interface type=JESD204B, Interpolation="16x, 1x, 2x, 4x, 8x", Number of DAC channels (#)=2, Reference type=Internal, Resolution (Bits)=16, Sample/update rate (MSPS)=1600, SFDR (dB)=81, Supplier 1=Mouser, Supplier 2=Digi-Key, Supplier Part Number 2=296-43411-ND
U2: "Dual-Channel, 12-bit, 800-MSPS Analog-to-Digital Converter with JESD204C interface.", Operating temperature range (ºC)="-40ºC to 125ºC", Power consumption (Typ) (mW)=1110, Rating=Automotive, Supplier Part Number 1=595-ADC12DJ2700AAV, Analog input BW (MHz)=6000, Architecture="Folding Interpolating", ComponentLink1Description=Manufacturer, ComponentLink1URL=https://www.ti.com/product/ADC12DJ800-Q1, Interface type="JESD204B, JESD204C", Number of ADC channels (#)=2, Resolution (Bits)=12, Sample rate (Max) (MSPS)=800, SNR (dB)=57.6, Supplier 1=Mouser, Supplier 2=Digi-Key, Supplier Part Number 2=296-48320-ND
U3: "MSP430™ FRAM Microcontroller IC 16-Bit 16MHz 64KB (64K x 8) FRAM 48-VQFN (7x7)", Manufacturer="Texas Instruments", Mouser Part Number=595-SP430FR5969IRGZR, Package="RGZ (S-PVQFN-N48)", Supplier Part Number 1=296-37875-1-ND, Temperature="-40°C to +85°C", ComponentLink1Description=Upverter, ComponentLink1URL=https://upverter.com/upn/revision/0afe62f7510e28e0/, ComponentLink2Description=Datasheet, ComponentLink2URL=http://www.ti.com/lit/ds/symlink/msp430fr5969.pdf, Num Pins=48, Supplier 1=Digi-Key, Supplier 2=Mouser, Supplier Part Number 2=595-SP430FR5969IRGZR

## Via types
v1: diameter 0.525, hole 0.254, Top Layer to Bottom Layer, 189 vias
v2: diameter 0.61, hole 0.305, Top Layer to Bottom Layer, 12 vias

## Nets (pads, with @x,y where several pads share a name; then routed paths per layer and width w, separated by ;. In a path a pad name is that pad's centre, name@x,y a point inside that pad or via, vN(x,y) a via of type N, cw(c..) or ccw(c..) an arc to the next point about the centre after c; other vN are vias at no path point)
+1.1V: C23.2 C24.2 C31.2 C32.2 C39.2 C40.2 FB1.1 FB3.1 FB5.1
  other v1: 11.787,6.3 11.787,7.3 11.787,8.3 11.787,9.3 11.787,10.3 11.787,11.3
+1.8V: FB7.1 FB8.1
+1.9V: C25.2 C26.2 C33.2 C34.2 FB2.1 FB4.1 FB6.1
  other v1: 14.7,16.113 15.7,16.113 16.7,16.113 17.7,16.113
+3.3V: FB9.1 J1.40 J2.40
+5V: J1.02 J2.02
ADC0_UNBAL: C18.1 R3.2 T2.4 | length 3.3
  Top Layer w0.254: T2.4@31.715,6 C18.1@34,6 R3.2@34,4.95
ADC1_UNBAL: C17.1 R1.2 T1.4 | length 3.3
  Top Layer w0.254: T1.4@31.715,18 33.943,18 34,17.943 R1.2@34,16.95
ADC_INA_N: T1.2 U2.A3 | length 9.3
  Top Layer w0.073: U2.A3@22.4,12.4 23.068,12.4 ccw(c23.068,13.716) 24.384,13.716 24.384,15.016 cw(c26.416,15.016) 26.416,17.048 27.968,17.048 cw(c27.968,16.73) T1.2@28.285,16.73
ADC_INA_P: T1.3 U2.A2 | length 9.2
  Top Layer w0.073: U2.A2@22.4,13.2 23.233,13.2 ccw(c23.233,13.716) 23.749,13.716 23.749,15.016 cw(c26.416,15.016) 26.416,17.683 27.968,17.683 ccw(c27.968,18) T1.3@28.285,18
ADC_INB_N: T2.2 U2.A7 | length 9.1
  Top Layer w0.073: U2.A7@22.4,9.2 22.423,9.2 cw(c22.423,8.128) 23.495,8.128 23.495,6.604 ccw(c25.019,6.604) 25.019,5.08 27.935,5.08 cw(c27.935,4.73) T2.2@28.285,4.73
ADC_INB_P: T2.3 U2.A6 | length 9.2
  Top Layer w0.073: U2.A6@22.4,10 cw(c22.4,8.27) 24.13,8.27 24.13,6.604 ccw(c25.019,6.604) 25.019,5.715 28,5.715 ccw(c28,6) T2.3@28.285,6
ADC_SPI_CS: J1.18 U2.E8
ADC_SYNC: J2.16 U2.C4
DAC0_UNBAL: C19.1 T3.4 | length 2.8
  Top Layer w0.254: T3.4@31.715,-6 C19.1@34.5,-6
DAC1_UNBAL: C20.1 T4.4 | length 2.8
  Top Layer w0.254: T4.4@31.715,-18 C20.1@34.5,-18
DAC_ALARM: U1.L8
DAC_IOUTA_N: T3.2 U1.C12 | length 8
  Top Layer w0.073: U1.C12@22.4,-10.4 22.747,-10.4 ccw(c22.747,-8.89) 24.257,-8.89 cw(c26.194,-8.89) 26.194,-6.952 27.968,-6.952 cw(c27.968,-7.27) T3.2@28.285,-7.27
DAC_IOUTA_P: T3.3 U1.B12 | length 7.9
  Top Layer w0.073: U1.B12@22.4,-9.6 22.912,-9.6 ccw(c22.912,-8.89) 23.622,-8.89 cw(c26.194,-8.89) 26.194,-6.317 27.968,-6.317 ccw(c27.968,-6) T3.3@28.285,-6
DAC_IOUTC_N: T4.2 U1.J12 | length 8.6
  Top Layer w0.073: U1.J12@22.4,-15.2 cw(c22.4,-16.549) 23.749,-16.549 23.749,-17.536 ccw(c25.166,-17.536) 25.166,-18.952 27.968,-18.952 cw(c27.968,-19.27) T4.2@28.285,-19.27
DAC_IOUTC_P: T4.3 U1.H12 | length 8.7
  Top Layer w0.073: U1.H12@22.4,-14.4 cw(c22.4,-16.384) 24.384,-16.384 24.384,-17.272 ccw(c25.429,-17.272) 25.429,-18.317 27.968,-18.317 ccw(c27.968,-18) T4.3@28.285,-18
DAC_RESET: U1.K8
DAC_SLEEP: U1.M8
DAC_SPI_CS: J1.14 U1.M9
DAC_SYNC_AB: J2.18 U1.L6
DAC_SYNC_CD: J2.20 U1.L7
DAC_TCLK: J8.3 U1.K4
DAC_TD0: J8.2 U1.M5
DAC_TDI: J8.4 U1.L5
DAC_TMS: J8.1 U1.L4
DAC_TRSTB: J8.5 U1.J3
DAC_TXEN: J2.14 U1.K5